# Altium PCB Steezy60ALPS.PcbDoc (part 1 of 3)
Units mm, origin at the board's own origin, x right, y up, seen from the top; angles counter-clockwise.
Board outline 284.73 x 94.2 mm, 2 copper layers (Component Side, Bottom Layer), stack 1.571 mm thick; 204 components, 132 nets, 895 pads, 223 vias.
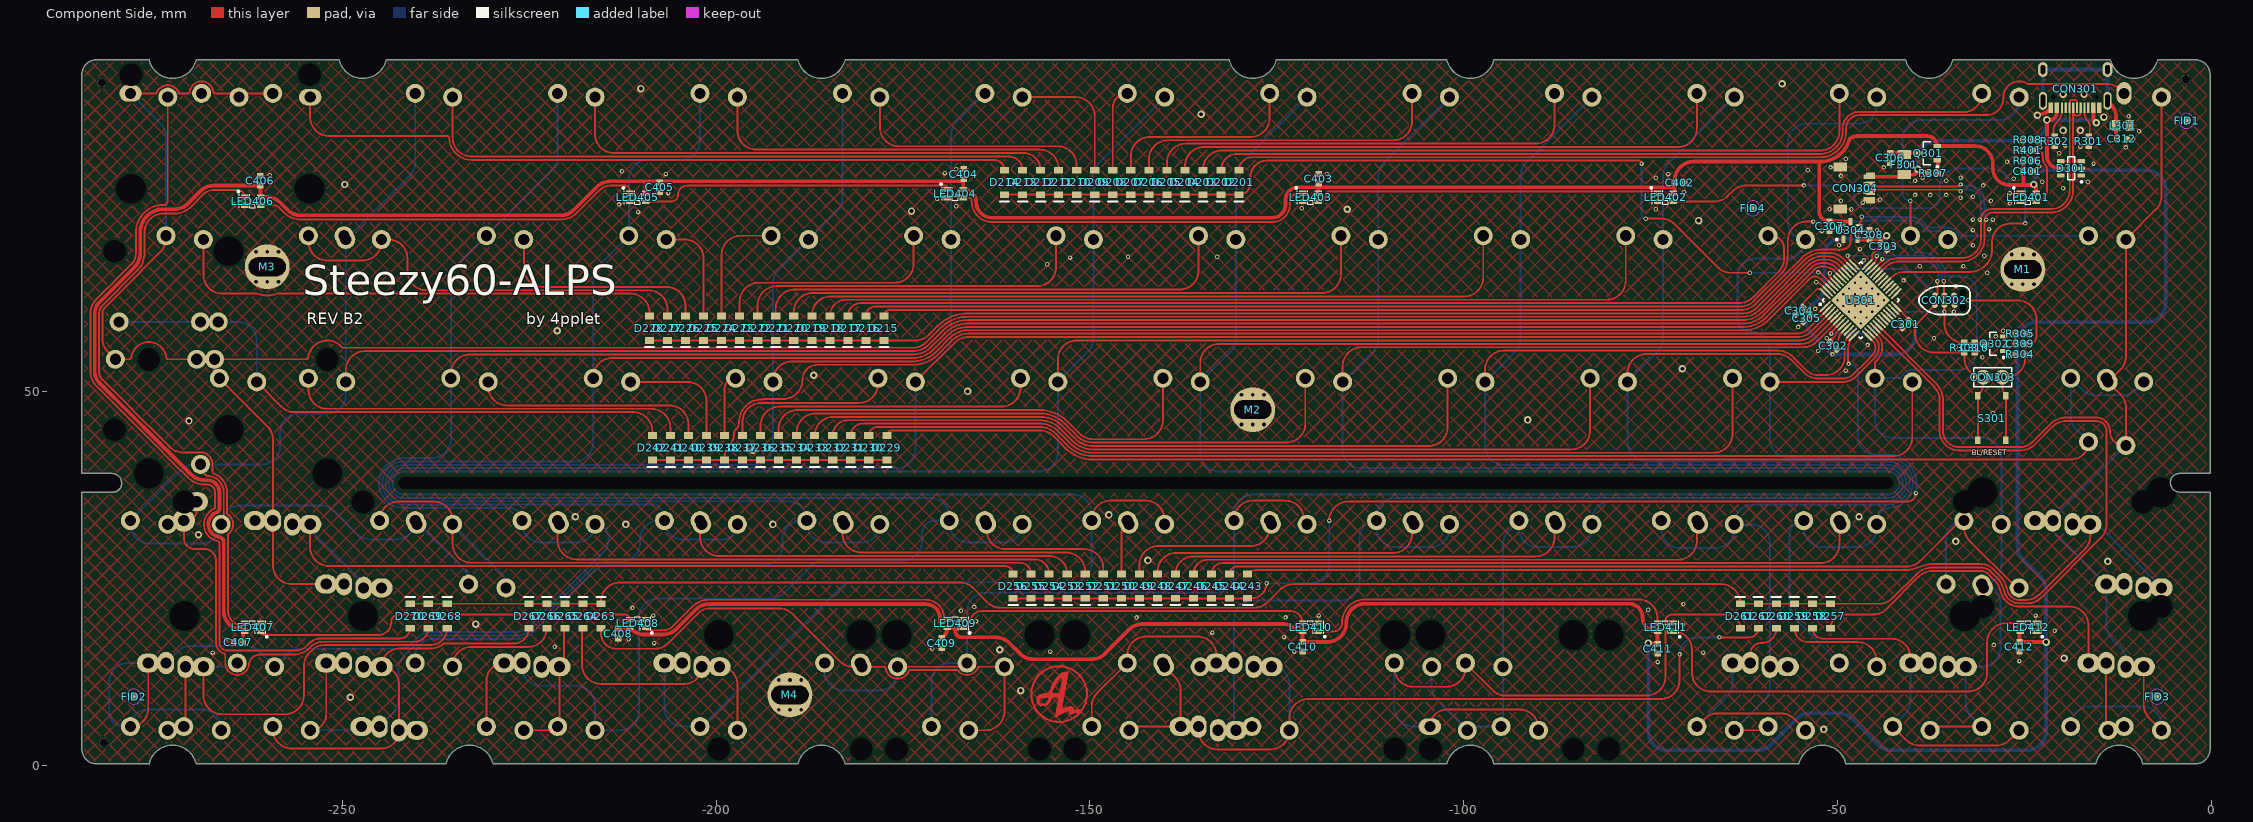
[diagram p0: Component Side view]
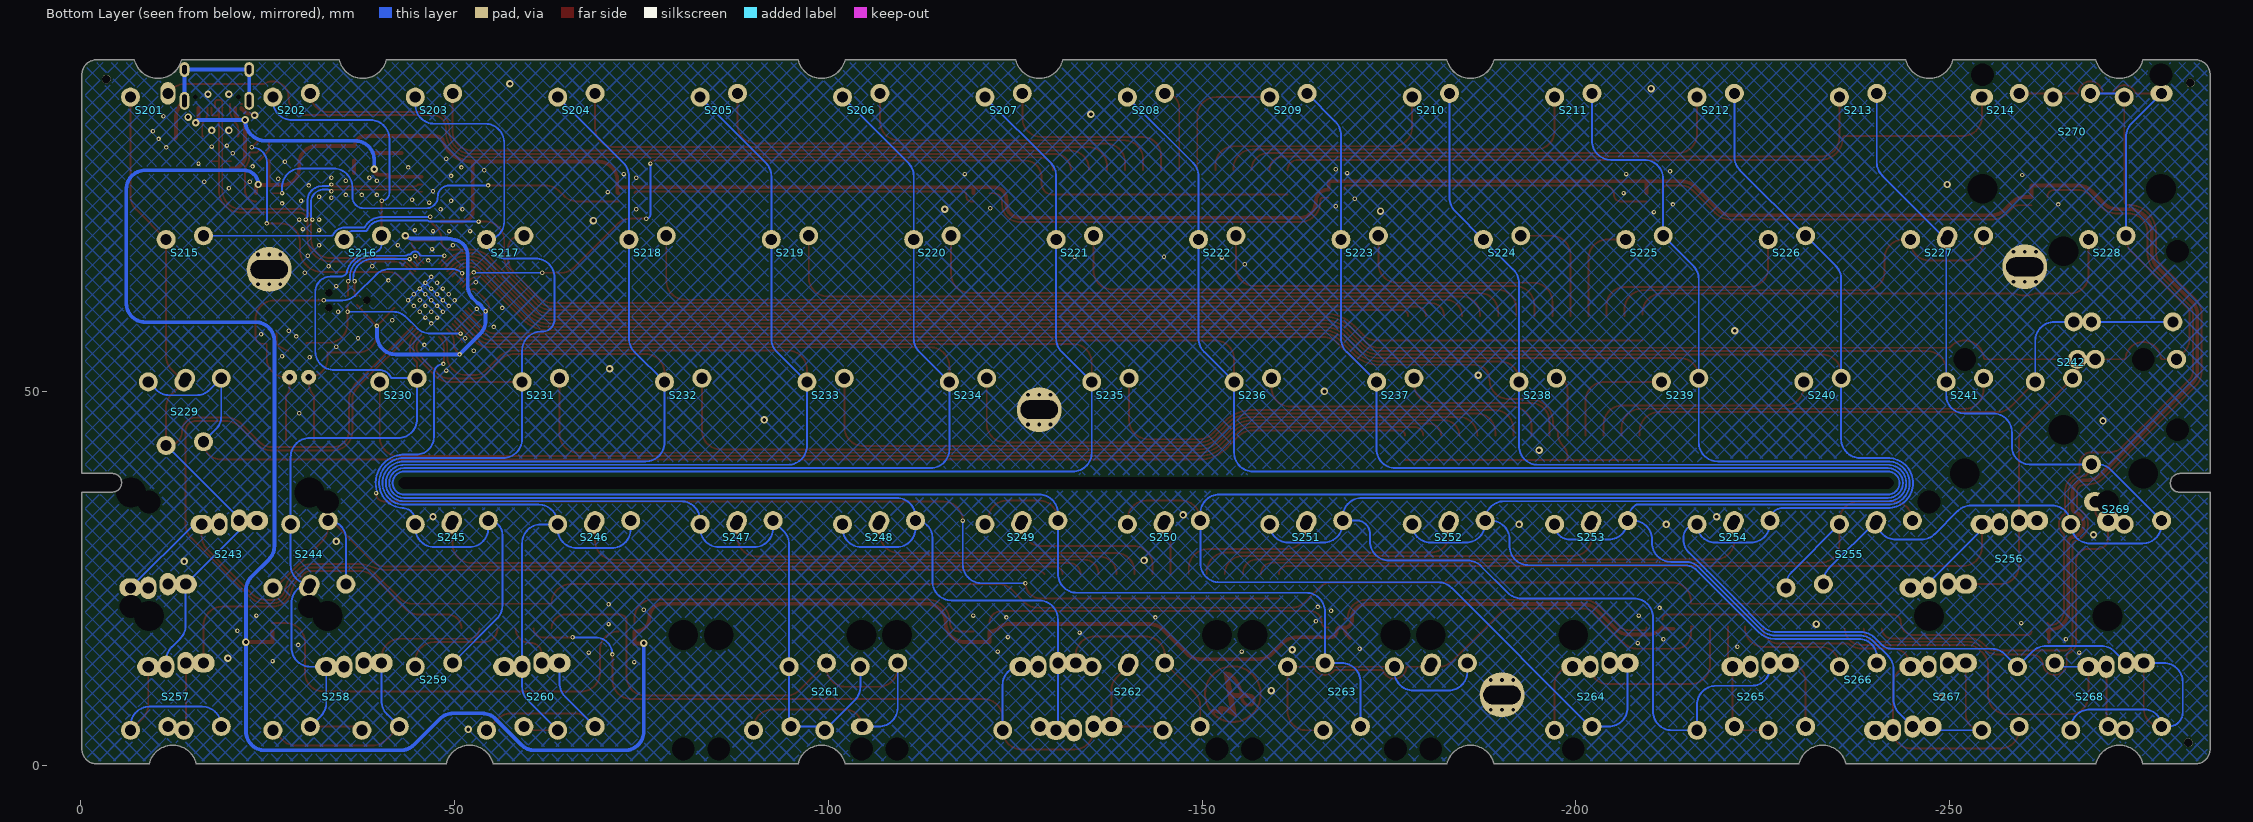
[diagram p1: Bottom Layer view, seen from below]
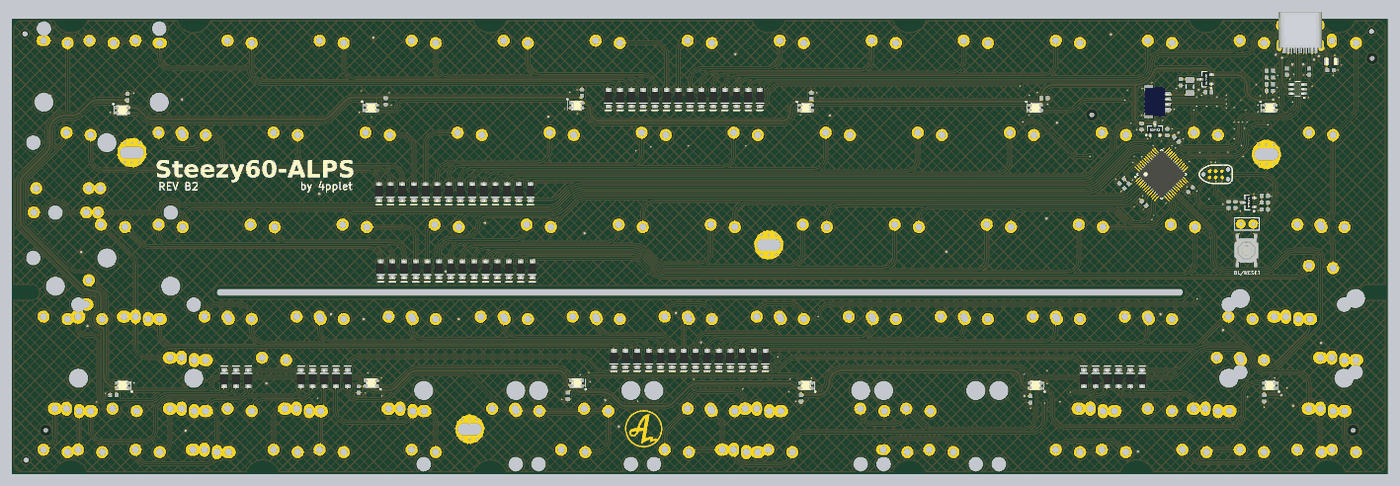
[diagram p4: 3D render of the assembled board from above, using the file's embedded part models]

## Layer stack, top to bottom
Top Solder: solder mask 0.0102, Solder Resist, Dk 3.5
Component Side: signal copper 0.0356
Dielectric 1: core 1.5, FR-4, Dk 4.2
Bottom Layer: signal copper 0.0356
Solder Side: solder mask 0.0102, Solder Resist, Dk 3.5

## Board outline
-284.85,2.215 ccw(c-282.85,2.215) -282.85,0.215 -275.85,0.215 cw(c-272.7,-0.52) -269.55,0.215 -236.137,0.215 cw(c-232.987,-0.52) -229.838,0.215 -189.05,0.215 cw(c-185.9,-0.52) -182.75,0.215 -102.25,0.215 cw(c-99.1,-0.52) -95.95,0.215 -55.161,0.215 cw(c-52.011,-0.52) -48.861,0.215 -15.45,0.215 cw(c-12.3,-0.52) -9.15,0.215 -2.15,0.215 ccw(c-2.15,2.215) -0.15,2.215 ccw(c-0.15,2.238) -0.127,2.238 -0.127,36.576 -4.191,36.576 cw(c-4.191,37.846) -5.461,37.846 cw(c-4.242,37.846) -4.242,39.065 -0.15,39.065 -0.15,92.415 ccw(c-2.15,92.415) -2.15,94.415 -7.177,94.415 cw(c-10.327,95.149) -13.477,94.415 -34.575,94.415 cw(c-37.724,95.149) -40.874,94.415 -95.95,94.415 cw(c-99.1,95.149) -102.25,94.415 -125.061,94.415 cw(c-128.211,95.149) -131.361,94.415 -182.75,94.415 cw(c-185.9,95.149) -189.05,94.415 -244.125,94.415 cw(c-247.274,95.149) -250.424,94.415 -269.55,94.415 cw(c-272.7,95.149) -275.85,94.415 -282.85,94.415 ccw(c-282.85,92.415) -284.85,92.415 -284.85,39.065 -280.797,39.065 cw(c-280.797,37.795) -279.527,37.795 -279.527,37.719 cw(c-280.67,37.719) -280.67,36.576 -284.861,36.576 -284.85,36.565

## Design rules (kind name [scope] priority, off if disabled: settings)
BoardOutlineClearance [All] p1: gap=0.254 ignorepadtopadclearanceinfootprint=FALSE except(0: Arc-SplitContinuation Track-SplitContinuation SMDPad-SplitContinuation THPad-SplitContinuation Via-SplitContinuation Fill-SplitContinuation Poly-SplitContinuation Region-SplitContinuation Text-SplitContinuation)
Clearance [All] p1: gap=0.2 ignorepadtopadclearanceinfootprint=FALSE except(0: Arc-Hole Track-Hole SMDPad-Hole THPad-Hole Via-Hole Fill-Hole Poly-Hole Region-Hole Text-Hole; 0.254: THPad-THPad THPad-Via THPad-Fill THPad-Poly THPad-Region THPad-Text Via-Via Via-Fill Via-Poly Via-Region Via-Text Fill-Fill Fill-Poly Fill-Region Fill-Text Poly-Poly Poly-Region Poly-Text Region-Region Region-Text Text-Text)
ComponentClearance [InComponent('No Component') And OnLayer('Component Side')] p1: gap=0.254 collisioncheckmode=3 verticalgap=0.254 showdistances=FALSE
DiffPairsRouting DiffPairsRouting_USB [InDifferentialPairClass('All Differential Pairs')] p1: maxlimit=0.254 minlimit=0.203 mostfreqgap=0.203 toplayer_minwidth=0.152 toplayer_maxwidth=0.381 toplayer_prefwidth=0.152 bottomlayer_minwidth=0.152 bottomlayer_maxwidth=0.381 bottomlayer_prefwidth=0.152 maxuncoupledlength=12.7
DiffPairsRouting [All] p2: maxlimit=0.254 minlimit=0.254 mostfreqgap=0.254 toplayer_minwidth=0.381 toplayer_maxwidth=0.381 toplayer_prefwidth=0.381 bottomlayer_minwidth=0.381 bottomlayer_maxwidth=0.381 bottomlayer_prefwidth=0.381 maxuncoupledlength=12.7
HoleSize [All] p1: absolutevalues=TRUE maxlimit=20 minlimit=0.025 maxpercent=80.000 minpercent=20.000
MatchedLengths MatchedLengths_USB_DiffPairs_1 [All] p1: tolerance=0.127 checknetsindiffpair=TRUE checkdiffpairvsdiffpair=FALSE checkxsignals=FALSE checkothers=FALSE
MatchedLengths MatchedLengths_USB_DiffPairs [All] p2: tolerance=0.127 checknetsindiffpair=TRUE checkdiffpairvsdiffpair=FALSE checkxsignals=FALSE checkothers=FALSE
PolygonConnect PolygonConnect_1 [All vs IsVia] p1: connectstyle=Direct reliefconductorwidth=0.254 reliefentries=4 polygonreliefangle="90 Angle" airgapwidth=0.254
PolygonConnect [All] p2: connectstyle=Relief reliefconductorwidth=0.254 reliefentries=4 polygonreliefangle="90 Angle" airgapwidth=0.254
RoutingVias [All] p1: holewidth=0.711 width=1.27 viastyle="Through Hole" minholewidth=0.711 minwidth=1.27 maxholewidth=0.711 maxwidth=1.27
SolderMaskExpansion [All] p1: expansion=0.102 istentingtop=FALSE
Width [All] p1: maxlimit=0.508 minlimit=0.203 preferedwidth=0.254 minimp=50.000000 maximp=50.000000 favimp=50.000000
27 further rules are at their usual default settings.

## Classes and differential pairs
component class Designator: C201 C202 C203 C204 C205 C206 D201 D202 D203 D204 D205 D206 D207 D208 D209 D210 D211 D212 D213 D214 D215 D216 D217 D218 D219 D220 D221 D222 D223 D224 D225 D226 D227 D228 D229 D230 D231 D232 D233 D234 D235 D236 D237 D238 D239 D240 D241 D242 D243 D244 D245 D246 D247 D248 D249 D250 D251 D252 D253 D254 D255 D256 D257 D258 D259 D260 D261 D262 D263 D264 D265 D266 D267 D268 D269 D270 S201 S202 S203 S204 S205 S206 S207 S208 S209 S210 S211 S212 S213 S214 S215 S216 S217 S218 S219 S220 S221 S222 S223 S224 S225 S226 S227 S228 S229 S230 S231 S232 S233 S234 S235 S236 S237 S238 S239 S240 S241 S242 S243 S244 S245 S246 S247 S248 S249 S250 S251 S252 S253 S254 S255 S256 S257 S258 S259 S260 S261 S262 S263 S264 S265 S266 S267 S268 S269 S270 S271
differential pair D: +D_P -D_N

## Components (designator, comment, footprint, x,y, rotation, side; value= is the part's Value field where it differs from the comment)
C301 "" C0603[1608] -40.894,59.055 r45 top value=0.1uF
C302 "" C0603[1608] -50.546,56.134 r315 top value=0.1uF
C303 "" C0603[1608] -43.815,69.469 r135 top value=0.1uF
C304 "" C0603[1608] -55.118,60.833 r45 top value=0.1uF
C305 "" C0603[1608] -54.102,59.817 r45 top value=0.1uF
C306 "" C0603[1608] -42.926,81.28 r90 top value=4.7uF
C307 "" C0603[1608] -51.054,72.136 r90 top value=1uF
C308 "" C0603[1608] -45.72,70.993 r270 top value=1uF
C309 "" C0603[1608] -25.531,56.416 r180 top value=4.7uF
C310 "" C0603[1608] -31.627,55.908 r270 top value=470nF
C312 "" C0603[1608] -11.938,83.82 r180 top value=0.1uF
C401 "" C0603[1608] -24.511,79.502 r180 top value=0.1uF
C402 "" C0603[1608] -71.12,77.978 r180 top value=0.1uF
C403 "" C0603[1608] -119.38,78.486 r270 top value=0.1uF
C404 "" C0603[1608] -166.878,79.121 r270 top value=0.1uF
C405 "" C0603[1608] -207.518,77.343 r90 top value=0.1uF
C406 "" C0603[1608] -260.985,78.232 r270 top value=0.1uF
C407 "" C0603[1608] -263.906,16.51 r0 top value=0.1uF
C408 "" C0603[1608] -213.106,17.653 r90 top value=0.1uF
C409 "" C0603[1608] -169.799,16.383 r90 top value=0.1uF
C410 "" C0603[1608] -121.539,15.875 r90 top value=0.1uF
C411 "" C0603[1608] -74.041,15.621 r90 top value=0.1uF
C412 "" C0603[1608] -25.654,15.875 r90 top value=0.1uF
CON301 "TYPE-C-31-M-12" TYPE-C-31-M-12 -18.2,88 r180 top
CON302 "TC2030-IDC" TC2030-IDC-NL -35.687,62.23 r0 top
CON303 "Header 2" HDR1X2 -27.94,51.943 r180 top
CON304 "Header 5" UDB_combo_JST_MOLEX -47.75,77.25 r270 top
D201 "Diode" SOD-123 -130.048,78 r90 top
D202 "Diode" SOD-123 -132.461,78 r90 top
D203 "Diode" SOD-123 -134.874,78 r90 top
D204 "Diode" SOD-123 -137.287,78 r90 top
D205 "Diode" SOD-123 -139.7,78 r90 top
D206 "Diode" SOD-123 -142.113,78 r90 top
D207 "Diode" SOD-123 -144.526,78 r90 top
D208 "Diode" SOD-123 -146.939,78 r90 top
D209 "Diode" SOD-123 -149.352,78 r90 top
D210 "Diode" SOD-123 -151.765,78 r90 top
D211 "Diode" SOD-123 -154.178,78 r90 top
D212 "Diode" SOD-123 -156.591,78 r90 top
D213 "Diode" SOD-123 -159.004,78 r90 top
D214 "Diode" SOD-123 -161.417,78 r90 top
D215 "Diode" SOD-123 -177.546,58.5 r90 top
D216 "Diode" SOD-123 -179.959,58.5 r90 top
D217 "Diode" SOD-123 -182.372,58.5 r90 top
D218 "Diode" SOD-123 -184.785,58.5 r90 top
D219 "Diode" SOD-123 -187.198,58.5 r90 top
D220 "Diode" SOD-123 -189.611,58.5 r90 top
D221 "Diode" SOD-123 -192.024,58.5 r90 top
D222 "Diode" SOD-123 -194.437,58.5 r90 top
D223 "Diode" SOD-123 -196.85,58.5 r90 top
D224 "Diode" SOD-123 -199.263,58.5 r90 top
D225 "Diode" SOD-123 -201.676,58.5 r90 top
D226 "Diode" SOD-123 -204.089,58.5 r90 top
D227 "Diode" SOD-123 -206.502,58.5 r90 top
D228 "Diode" SOD-123 -208.915,58.5 r90 top
D229 "Diode" SOD-123 -177.165,42.5 r90 top
D230 "Diode" SOD-123 -179.578,42.5 r90 top
D231 "Diode" SOD-123 -181.991,42.5 r90 top
D232 "Diode" SOD-123 -184.404,42.5 r90 top
D233 "Diode" SOD-123 -186.817,42.5 r90 top
D234 "Diode" SOD-123 -189.23,42.5 r90 top
D235 "Diode" SOD-123 -191.643,42.5 r90 top
D236 "Diode" SOD-123 -194.056,42.5 r90 top
D237 "Diode" SOD-123 -196.469,42.5 r90 top
D238 "Diode" SOD-123 -198.882,42.5 r90 top
D239 "Diode" SOD-123 -201.295,42.5 r90 top
D240 "Diode" SOD-123 -203.708,42.5 r90 top
D241 "Diode" SOD-123 -206.121,42.5 r90 top
D242 "Diode" SOD-123 -208.534,42.5 r90 top
D243 "Diode" SOD-123 -128.905,24 r90 top
D244 "Diode" SOD-123 -131.318,24 r90 top
D245 "Diode" SOD-123 -133.731,24 r90 top
D246 "Diode" SOD-123 -136.144,24 r90 top
D247 "Diode" SOD-123 -138.557,24 r90 top
D248 "Diode" SOD-123 -140.97,24 r90 top
D249 "Diode" SOD-123 -143.383,24 r90 top
D250 "Diode" SOD-123 -145.796,24 r90 top
D251 "Diode" SOD-123 -148.209,24 r90 top
D252 "Diode" SOD-123 -150.622,24 r90 top
D253 "Diode" SOD-123 -153.035,24 r90 top
D254 "Diode" SOD-123 -155.448,24 r90 top
D255 "Diode" SOD-123 -157.861,24 r90 top
D256 "Diode" SOD-123 -160.274,24 r90 top
D257 "Diode" SOD-123 -50.927,20 r270 top
D258 "Diode" SOD-123 -53.34,20 r270 top
D259 "Diode" SOD-123 -55.753,20 r270 top
D260 "Diode" SOD-123 -58.166,20 r270 top
D261 "Diode" SOD-123 -62.992,20 r270 top
D262 "Diode" SOD-123 -60.579,20 r270 top
D263 "Diode" SOD-123 -215.392,20 r270 top
D264 "Diode" SOD-123 -217.805,20 r270 top
D265 "Diode" SOD-123 -220.218,20 r270 top
D266 "Diode" SOD-123 -222.631,20 r270 top
D267 "Diode" SOD-123 -225.044,20 r270 top
D268 "Diode" SOD-123 -235.966,20 r270 top
D269 "Diode" SOD-123 -238.506,20 r270 top
D270 "Diode" SOD-123 -240.919,20 r270 top
D301 "SRV05" SOT-23-6 -18.73,79.883 r0 top
F301 "Fuse Thermal" C1206[3216] -41.052,80.391 r270 top
FID1 "Plug" FIDUCIAL_NORDIC -3.302,86.233 r270 top
FID2 "Plug" FIDUCIAL_NORDIC -277.876,9.215 r270 top
FID3 "Plug" FIDUCIAL_NORDIC -7.239,9.215 r270 top
FID4 "Plug" Fiducial_Nordic -61.341,74.549 r90 top
L301 "Inductor" L0805 -11.811,85.598 r180 top
LED401 "WS2812B" "WS2812B - 2020" -24.5,76 r0 top locked
LED402 "WS2812B" "WS2812B - 2020" -73,76 r0 top locked
LED403 "WS2812B" "WS2812B - 2020" -120.486,76 r0 top locked
LED404 "WS2812B" "WS2812B - 2020" -168,76.5 r0 top locked
LED405 "WS2812B" "WS2812B - 2020" -210.5,76 r0 top locked
LED406 "WS2812B" "WS2812B - 2020" -262,75.5 r0 top locked
LED407 "WS2812B" "WS2812B - 2020" -262,18.5 r180 top locked
LED408 "WS2812B" "WS2812B - 2020" -210.5,19 r180 top locked
LED409 "WS2812B" "WS2812B - 2020" -168,19 r180 top locked
LED410 "WS2812B" "WS2812B - 2020" -120.486,18.5 r180 top locked
LED411 "WS2812B" "WS2812B - 2020" -73,18.5 r180 top locked
LED412 "WS2812B" "WS2812B - 2020" -24.5,18.5 r180 top locked
M1 "Socket" mounting_hole -25.2,66.365 r0 top
M2 "Socket" mounting_hole -128.212,47.614 r0 top
M3 "Socket" mounting_hole -260.05,66.715 r0 top
M4 "Socket" mounting_hole -190.119,9.45 r0 top
Q301 "PMOS-2" SOT-23-3 -37.846,81.915 r0 top
Q302 "2N7002 NMOS" SOT-23-3 -28.96,56.416 r0 top
R301 "Res1" R0603[1608] -16.383,83.5 r270 top value=5k1
R302 "Res1" R0603[1608] -20.955,83.5 r270 top value=5k1
R303 "Res1" R0603[1608] -33.024,55.908 r90 top value=10K
R304 "Res1" R0603[1608] -25.527,54.991 r180 top value=10K
R305 "Res1" R0603[1608] -25.527,57.785 r0 top value=100K
R306 "Res1" R0603[1608] -24.511,80.899 r0 top value=10K
R307 "Res1" R0603[1608] -37.211,79.248 r180 top value=10K
R308 "Res1" R0603[1608] -24.511,83.693 r0 top value=470
R401 "Res1" R0603[1608] -24.511,82.296 r0 top value=470R
S201 "MX" "Alps-switch - switched pol"#1 -9.15,85.415 r180 bottom
S202 "MX" "Alps-switch - switched pol"#2 -28.2,85.415 r180 bottom locked
S203 "MX" "Alps-switch - switched pol"#2 -47.25,85.415 r180 bottom locked
S204 "MX" "Alps-switch - switched pol"#2 -66.3,85.415 r180 bottom locked
S205 "MX" "Alps-switch - switched pol"#2 -85.35,85.415 r180 bottom locked
S206 "MX" "Alps-switch - switched pol"#2 -104.4,85.415 r180 bottom locked
S207 "MX" "Alps-switch - switched pol"#2 -123.45,85.415 r180 bottom locked
S208 "MX" "Alps-switch - switched pol"#2 -142.5,85.415 r180 bottom locked
S209 "MX" ALPS-SWITCH -161.55,85.415 r180 bottom locked
S210 "MX" ALPS-SWITCH -180.6,85.415 r180 bottom locked
S211 "MX" ALPS-SWITCH -199.65,85.415 r180 bottom locked
S212 "MX" ALPS-SWITCH -218.7,85.415 r180 bottom locked
S213 "MX" ALPS-SWITCH -237.75,85.415 r180 bottom locked
S214 "MX" "ALPS-SWITCH - FLAT PIN1" -256.8,85.415 r180 bottom
S215 "MX" "ALPS-switch - 1.25U - switched pol" -13.912,66.365 r180 bottom locked
S216 "MX" ALPS-SWITCH -37.725,66.365 r180 bottom locked
S217 "MX" "Alps-switch - switched pol"#2 -56.775,66.365 r180 bottom locked
S218 "MX" "Alps-switch - switched pol"#2 -75.825,66.365 r180 bottom locked
S219 "MX" "Alps-switch - switched pol"#2 -94.875,66.365 r180 bottom locked
S220 "MX" "Alps-switch - switched pol"#2 -113.925,66.365 r180 bottom locked
S221 "MX" "Alps-switch - switched pol"#2 -132.975,66.365 r180 bottom locked
S222 "MX" "Alps-switch - switched pol"#2 -152.025,66.365 r180 bottom locked
S223 "MX" "Alps-switch - switched pol"#2 -171.075,66.365 r180 bottom locked
S224 "MX" "Alps-switch - switched pol"#2 -190.125,66.365 r180 bottom locked
S225 "MX" ALPS-SWITCH -209.175,66.365 r180 bottom locked
S226 "MX" ALPS-SWITCH -228.225,66.365 r180 bottom locked
S227 "MX" "ALPS-SWITCH - OFFSET-R" -247.275,66.365 r180 bottom locked
S228 "MX" "ALPS-SWITCH - 1.5U" -271.087,66.365 r180 bottom locked
S229 "MX" "ALPS-SWITCH - CAPS" -16.294,47.315 r180 bottom locked
S230 "MX" ALPS-SWITCH -42.487,47.315 r180 bottom locked
S231 "MX" "Alps-switch - switched pol"#2 -61.537,47.315 r180 bottom locked
S232 "MX" "Alps-switch - switched pol"#2 -80.587,47.315 r180 bottom locked
S233 "MX" "Alps-switch - switched pol"#2 -99.637,47.315 r180 bottom locked
S234 "MX" "Alps-switch - switched pol"#2 -118.687,47.315 r180 bottom locked
S235 "MX" "Alps-switch - switched pol"#2 -137.737,47.315 r180 bottom locked
S236 "MX" "Alps-switch - switched pol"#2 -156.787,47.315 r180 bottom locked
S237 "MX" "Alps-switch - switched pol"#2 -175.837,47.315 r180 bottom locked
S238 "MX" "Alps-switch - switched pol"#2 -194.887,47.315 r180 bottom locked
S239 "MX" ALPS-SWITCH -213.937,47.315 r180 bottom locked
S240 "MX" ALPS-SWITCH -232.987,47.315 r180 bottom locked
S241 "MX" "Alps-switch - switched pol"#3 -252.037,47.315 r180 bottom locked
S242 "MX" "ALPS-switch - Enter - rotated stab" -263.95,47.315 r180 bottom locked
S243 "MX" "ALPS-SWITCH - LEFT SHIFT" -21.056,28.265 r180 bottom locked
S244 "MX" "ALPS-SWITCH - SMALLEROFFSET-R" -32.962,28.265 r0 bottom
S245 "MX" "ALPS-SWITCH - OFFSET" -52.012,28.265 r180 bottom locked
S246 "MX" "ALPS-SWITCH - OFFSET" -71.062,28.265 r180 bottom locked
S247 "MX" "ALPS-SWITCH - OFFSET" -90.112,28.265 r180 bottom locked
S248 "MX" "ALPS-SWITCH - OFFSET" -109.162,28.265 r180 bottom locked
S249 "MX" "ALPS-SWITCH - OFFSET" -128.212,28.265 r180 bottom locked
S250 "MX" "ALPS-SWITCH - OFFSET" -147.262,28.265 r180 bottom locked
S251 "MX" "ALPS-SWITCH - OFFSET" -166.312,28.265 r180 bottom locked
S252 "MX" "ALPS-SWITCH - OFFSET" -185.362,28.265 r180 bottom locked
S253 "MX" "ALPS-SWITCH - OFFSET" -204.412,28.265 r180 bottom locked
S254 "MX" "ALPS-SWITCH - OFFSET" -223.462,28.265 r180 bottom locked
S255 "MX" "ALPS-SWITCH - CRAZY SHIFT" -237.75,28.265 r180 bottom locked
S256 "MX" "ALPS-SWITCH - RIGHT SHIFT" -259.18,28.265 r180 bottom locked
S257 "MX" "ALPS-switch - L_CTRL" -13.912,9.215 r180 bottom locked
S258 "MX" "ALPS-SWITCH - L_WIN" -37.724,9.215 r180 bottom
S259 "MX" ALPS-SWITCH -47.25,9.215 r180 bottom
S260 "MX" "ALPS-SWITCH - L_ALT" -61.537,9.215 r180 bottom locked
S261 "MX" "ALPS-SWITCH - L SPLIT SPACE" -102.018,9.215 r0 bottom locked
S262 "MX" "ALPS-SWITCH - SPACE" -142.499,9.215 r180 bottom locked
S263 "MX" "ALPS-switch - R split space" -163.931,9.215 r0 bottom locked
S264 "MX" "ALPS-SWITCH - R PN" -202.031,9.215 r180 bottom
S265 "MX" "ALPS-SWITCH - R_ALT" -223.462,9.215 r180 bottom
S266 "MX" ALPS-SWITCH -237.75,9.215 r180 bottom
S267 "MX" "ALPS-SWITCH - R_WIN" -247.274,9.215 r180 bottom locked
S268 "MX" "ALPS-SWITCH - R_CTRL" -271.087,9.215 r180 bottom locked
S269 "MX" "ALPS-SWITCH - FN AND SHIFT" -275.85,28.265 r180 bottom
S270 "MX" "ALPS-SWITCH - BACKSPACE" -266.325,85.415 r180 bottom
S301 "SW-PB" "XKB Switch" -29.337,46.482 r90 top
U301 "STM32F072/F303_LQFP48" "STM32 - COMBO 7X7MM" -46.89,62.251 r315 top
U304 "XC6206P332MR" SOT-23-3 -48.26,71.571 r270 top

## Footprints (in the part's own frame and the unit in brackets; to place one, negate y for a bottom-side part, rotate by r counter-clockwise, add the part's x,y. Pads: shape width x height; smd on the part's side, far side on the other; paste and mask are expansions set on the pad)
ALPS-SWITCH [mm]
  round 2.54 hole 1.499 mask+0.102: 1(-2.5,4) 2(2.5,4.5)
  round 1 on Mech14: ""(0,0)
"ALPS-SWITCH - 1.5U" [mm]
  round 2.54 hole 1.499 mask+0.102: 1(-2.5,4) 2(2.5,4.5)
  round 1 on Mech14: ""(0,0)
"ALPS-switch - 1.25U - switched pol" [mm]
  round 2.54 hole 1.499 mask+0.102: 1(2.5,4.5) 2(-2.5,4)
  round 1 on Mech14: ""(0,0)
"ALPS-SWITCH - BACKSPACE" [mil]
  round 100 hole 59 mask+4: 1(98.43,177.17) 1(276.57,157.48) 2(-98.43,157.48)
  oval 118.11x86.61 hole 59 mask+4: 2(473.43,177.17)
  round 60 hole 157.01 unplated: ""(-470,-325) ""(470,-325)
  round 60 hole 120 unplated: ""(-470,275) ""(470,275)
  round 39.37 on Mech14: ""(0,0) ""(375,0)
"ALPS-SWITCH - CAPS" [mm]
  round 2.54 hole 1.499 mask+0.102: 1(-7.263,4) 1(0.119,-4) 1(2.5,4.5) 2(-4.881,-4.5) 2(-2.5,4) 2(-2.262,4.5)
  round 1 on Mech14: ""(-4.763,0) ""(-2.381,0) ""(0,0)
"ALPS-SWITCH - CRAZY SHIFT" [mm]
  round 2.54 hole 1.499 mask+0.102: 1(-9.644,-4.5) 1(-2.5,4) 1(7.263,4.5) 2(-4.644,-4) 2(2.262,4) 2(2.5,4.5)
  round 1 on Mech14: ""(-7.144,0) ""(0,0) ""(4.763,0)
"ALPS-switch - Enter - rotated stab" [mil]
  round 100 hole 59 mask+4: 1(-98.43,157.48) 1(104.28,473.62) 1(198.03,473.62) 1(626.43,473.62) 2(98.43,177.17) 2(123.97,276.77) 2(217.72,276.77) 2(646.11,276.77)
  round 60 hole 157.01 unplated: ""(-470,-325) ""(50.2,-94.8) ""(50.2,845.2) ""(470,-325)
  round 60 hole 120 unplated: ""(-470,275) ""(470,275) ""(650.2,-94.8) ""(650.2,845.2)
  round 39.37 on Mech14: ""(0,0) ""(281.45,375.2) ""(375.2,375.2) ""(468.95,375.2)
"ALPS-SWITCH - FLAT PIN1" [mm]
  oval 3x2.2 hole 1.499 mask+0.102: 1(-2.5,4)
  round 2.54 hole 1.499 mask+0.102: 2(2.5,4.5)
  round 1 on Mech14: ""(0,0)
"ALPS-SWITCH - FN AND SHIFT" [mm]
  oval 3x2.54 hole 1.499 mask+0.102: 1(-6.381,7.025)
  round 3 hole 1.499 mask+0.102: 1(-4.644,4.5)
  round 2.54 hole 1.499 mask+0.102: 1(-2.5,4) 2(-9.644,4) 2(-6.881,12.025) 2(2.5,4.5)
  round 1 on Mech14: ""(-7.144,0) ""(-2.381,9.525) ""(0,0)
"ALPS-SWITCH - L SPLIT SPACE" [mil]
  round 100 hole 59 mask+4: 1(-285.93,-177.17) 1(89.07,-177.17) 1(473.43,177.17) 2(-89.07,-157.48) 2(98.43,177.17) 2(276.57,157.48) 2(285.93,-157.48)
  oval 118.11x86.61 hole 59 mask+4: 1(-98.43,157.48)
  round 60 hole 157.01 unplated: ""(-282.5,-325) ""(-95,-325)
  round 60 hole 120 unplated: ""(-282.5,275) ""(-95,275)
  round 39.37 on Mech14: ""(-187.5,0) ""(0,0) ""(187.5,0) ""(375,0)
"ALPS-SWITCH - L_ALT" [mm]
  round 2.54 hole 1.499 mask+0.102: 1(-7.263,-4.5) 1(7.263,-4) 2(-2.262,-4) 2(2.262,-4.5)
  oval 2.2x3 hole 1.499 mask+0.102: 1(0.119,4.5) 2(-2.5,4)
  oval 3x2.54 hole 1.499 mask+0.102: 1(2.5,4.5) 2(-4.881,4)
  round 1 on Mech14: ""(-4.763,0) ""(-2.381,0) ""(0,0) ""(4.763,0)
"ALPS-switch - L_CTRL" [mm]
  round 2.54 hole 1.499 mask+0.102: 1(-2.262,-4) 1(-0.119,-4.5) 2(-7.263,-4.5) 2(4.881,-4)
  oval 2.2x3 hole 1.499 mask+0.102: 1(0.119,4.5) 2(-2.5,4)
  oval 3x2.54 hole 1.499 mask+0.102: 1(2.5,4.5) 2(-4.881,4)
  round 1 on Mech14: ""(-4.763,0) ""(-2.381,0) ""(0,0) ""(2.381,0)
"ALPS-SWITCH - L_WIN" [mm]
  round 2.54 hole 1.499 mask+0.102: 1(-12.025,-4.5) 1(4.881,-4) 2(-7.025,-4) 2(-0.119,-4.5)
  oval 2.2x3 hole 1.499 mask+0.102: 1(0.119,4.5) 2(-2.5,4)
  oval 3x2.54 hole 1.499 mask+0.102: 1(2.5,4.5) 2(-4.881,4)
  round 1 on Mech14: ""(-9.525,0) ""(-2.381,0) ""(0,0) ""(2.381,0)
"ALPS-SWITCH - LEFT SHIFT" [mm]
  oval 3x2.54 hole 1.499 mask+0.102: 1(-14.406,-4.5) 1(-4.881,4) 2(-7.025,-4) 2(2.5,4.5)
  oval 2.2x3 hole 1.499 mask+0.102: 1(-12.025,-4.5) 1(-2.5,4) 2(-9.406,-4) 2(0.119,4.5)
  round 1.524 hole 3.048 unplated: ""(-14.319,-6.985) ""(-11.938,6.985) ""(9.557,-6.985) ""(11.938,6.985)
  round 1.524 hole 3.988 unplated: ""(-14.319,8.255) ""(-11.938,-8.255) ""(9.557,8.255) ""(11.938,-8.255)
  round 1 on Mech14: ""(-11.906,0) ""(-9.525,0) ""(-2.381,0) ""(0,0)
"ALPS-SWITCH - OFFSET" [mm]
  round 2.54 hole 1.499 mask+0.102: 1(-2.5,4) 1(-2.262,4.5) 2(-7.263,4) 2(2.5,4.5)
  round 1 on Mech14: ""(-4.763,0) ""(0,0)
"ALPS-SWITCH - OFFSET-R" [mm]
  round 2.54 hole 1.499 mask+0.102: 1(-2.5,4) 1(7.263,4.5) 2(2.262,4) 2(2.5,4.5)
  round 1 on Mech14: ""(-4.763,0) ""(0,0) ""(4.763,0)
"ALPS-SWITCH - R PN" [mm]
  round 2.54 hole 1.499 mask+0.102: 1(-4.881,-4.5) 2(0.119,-4)
  oval 3x2.54 hole 1.499 mask+0.102: 1(-2.5,4) 2(4.881,4.5)
  oval 2.2x3 hole 1.499 mask+0.102: 1(-0.119,4) 2(2.5,4.5)
  round 1 on Mech14: ""(-2.381,0) ""(0,0) ""(2.381,0)
"ALPS-switch - R split space" [mil]
  round 100 hole 59 mask+4: 1(-660.93,-177.17) 1(-651.57,-157.48) 1(-89.07,177.17) 1(98.43,-157.48) 2(-848.43,-177.17) 2(-464.07,-157.48) 2(-285.93,157.48) 2(-98.43,-177.17)
  round 39.37 on Mech14: ""(-750,0) ""(-562.5,0) ""(-187.5,0) ""(0,0) ""(0,0)
  round 60 hole 157.01 unplated: ""(-470,-325) ""(282.5,-325) ""(470,-325)
  round 60 hole 120 unplated: ""(-470,275) ""(282.5,275) ""(470,275)
"ALPS-SWITCH - R_ALT" [mm]
  oval 3x2.54 hole 1.499 mask+0.102: 1(-2.5,4) 2(4.881,4.5)
  round 2.54 hole 1.499 mask+0.102: 1(-2.262,-4) 1(2.262,-4.5) 2(-7.263,-4.5) 2(7.263,-4)
  oval 2.2x3 hole 1.499 mask+0.102: 1(-0.119,4) 2(2.5,4.5)
  round 1 on Mech14: ""(-4.763,0) ""(0,0) ""(2.381,0) ""(4.763,0)
"ALPS-SWITCH - R_CTRL" [mm]
  round 2.54 hole 1.499 mask+0.102: 1(-7.025,4.5) 1(0.119,-4) 1(2.262,-4.5) 2(-12.025,4) 2(-4.881,-4.5) 2(7.263,-4)
  oval 3x2.54 hole 1.499 mask+0.102: 1(-2.5,4) 2(4.881,4.5)
  oval 2.2x3 hole 1.499 mask+0.102: 1(-0.119,4) 2(2.5,4.5)
  round 1 on Mech14: ""(-9.525,0) ""(-2.381,0) ""(0,0) ""(2.381,0) ""(4.763,0)
"ALPS-SWITCH - R_WIN" [mm]
  oval 3x2.54 hole 1.499 mask+0.102: 1(-7.237,-4.5) 1(-2.5,4) 2(0.144,-4) 2(4.881,4.5)
  oval 2.2x3 hole 1.499 mask+0.102: 1(-4.856,-4.5) 1(-0.119,4) 2(-2.237,-4) 2(2.5,4.5)
  round 2.54 hole 1.499 mask+0.102: 1(12.025,-4) 2(7.025,-4.5)
  round 1 on Mech14: ""(-4.763,0) ""(-2.381,0) ""(0,0) ""(2.381,0) ""(9.525,0)
"ALPS-SWITCH - RIGHT SHIFT" [mm]
  oval 3x2.54 hole 1.499 mask+0.102: 1(-14.406,-4.5) 1(-4.881,4) 2(-7.025,-4) 2(2.5,4.5)
  oval 2.2x3 hole 1.499 mask+0.102: 1(-12.025,-4.5) 1(-2.5,4) 2(-9.406,-4) 2(0.119,4.5)
  round 1.524 hole 3.988 unplated: ""(-11.938,-8.255) ""(11.938,-8.255)
  round 1.524 hole 3.048 unplated: ""(-11.938,6.985) ""(11.938,6.985)
  round 1 on Mech14: ""(-11.906,0) ""(-9.525,0) ""(-2.381,0) ""(0,0)
"ALPS-SWITCH - SMALLEROFFSET-R" [mm]
  round 2.54 hole 1.499 mask+0.102: 1(-2.5,4) 1(-0.119,-4.5) 1(7.263,4.5) 2(2.262,4) 2(2.5,4.5) 2(4.881,-4)
  round 1 on Mech14: ""(0,0) ""(2.381,0) ""(4.763,0)
"ALPS-SWITCH - SPACE" [mm]
  round 2.54 hole 1.499 mask+0.102: 1(-19.176,-4.5) 1(-2.5,4) 1(-2.248,4.5) 1(2.248,-4.5) 2(-14.176,-4) 2(-7.248,4) 2(2.5,4.5) 2(7.248,-4)
  oval 3x2.54 hole 1.499 mask+0.102: 1(-16.795,4) 1(-4.644,-4) 2(-12.025,-4.5) 2(-9.414,4.5)
  oval 2.2x3 hole 1.499 mask+0.102: 1(-14.414,4) 1(-7.025,-4) 2(-11.795,4.5) 2(-9.644,-4.5)
  round 1.524 hole 3.048 unplated: ""(-61.91,-6.985) ""(-57.15,-6.985) ""(38.09,-6.985) ""(57.15,-6.985)
  round 1.524 hole 3.988 unplated: ""(-61.91,8.255) ""(-57.15,8.255) ""(38.09,8.255) ""(57.15,8.255)
  round 1 on Mech14: ""(-16.676,0) ""(-14.295,0) ""(-11.914,0) ""(-9.525,0) ""(-7.136,0) ""(-4.748,0) ""(0,0) ""(4.748,0)
"Alps-switch - switched pol"#1 [mm]
  oval 2x3 hole 1.499 mask+0.102: 1(2.5,4.5)
  round 2.54 hole 1.499 mask+0.102: 2(-2.5,4)
  round 1 on Mech14: ""(0,0)
"Alps-switch - switched pol"#2 [mm]
  round 2.54 hole 1.499 mask+0.102: 1(2.5,4.5) 2(-2.5,4)
  round 1 on Mech14: ""(0,0)
"Alps-switch - switched pol"#3 [mm]
  round 2.54 hole 1.5 mask+0.102: 1(2.5,4.5) 2(-2.5,4)
  round 1 on Mech14: ""(0,0)
C0603[1608] [mm] "Chip Resistor, 2-Leads, Body 1,57x0,80mm, IPC Medium Density"
  rect 0.8x0.85 smd: 1(-0.65,0) 2(0.65,0)
  body extent -0.83,-0.43 0.82,0.43, height 0.5
C1206[3216] [mm]
  rect 1.2x1.8 smd: 1(-1.35,0) 2(1.35,0)
  silkscreen extent -0.35,-0.8 0.35,0.8, body extent -1.6,-0.9 1.6,0.9, height 1.2
FIDUCIAL_NORDIC [mm]
  round 1 smd paste+0 mask+0.5: 0(0,0)
  Component Side keep-out circle w0.01: c0,0 r1
Fiducial_Nordic [mm]
  round 1 smd paste+0 mask+0.5: 0(0,0)
  Component Side keep-out circle w0.01: c0,0 r1
HDR1X2 [mm] "Connector; Header; 2 Position"
  round 2 hole 0.9 mask+0.102: 1(0,0) 2(2.54,0)
  silkscreen extent -1.27,-1.27 3.81,1.27
L0805 [mm] "based on Sunlord-GZ2012D101TF_C1015 datasheet"
  rect 1.16x1.47 smd: 1(-0.92,0) 2(0.92,0)
  body extent -1.15,-0.72 1.15,0.72, height 1.02
mounting_hole [mm]
  round 1 hole 0.5 paste+0 mask+0: 1(-1.5,-2) 1(-1.5,2) 1(0,-2) 1(0,2) 1(1.5,-2) 1(1.5,2)
  round 6 hole 2.5 slot 5 at 0 deg: 1(0,0)
R0603[1608] [mm] "Chip Resistor, 2-Leads, Body 1,57x0,80mm, IPC Medium Density"
  rect 0.8x0.85 smd: 1(-0.65,0) 2(0.65,0)
  body extent -0.83,-0.43 0.82,0.43, height 0.5
SOD-123 [mm]
  rect 0.91x1.22 smd: 1(1.635,0) 2(-1.635,0)
  silkscreen extent -2.54,-0.64 -2.54,0.63, body extent -1.87,-0.85 1.88,0.85, height 1.2
SOT-23-3 [mm] "3.3v regulator, used in Windsond S2 proto 1"
  rect 1x0.55 smd: 1(1.2,-0.95) 2(1.2,0.95) 3(-1.2,0)
  silkscreen extent -0.7,-1.95 1.33,1.55, body extent -1.1,-1.5 1.45,1.5, height 1
SOT-23-6 [mm]
  rect 1x0.55 smd: 1(1.375,-0.95) 2(1.375,0) 3(1.375,0.95) 4(-1.375,0.95) 5(-1.375,0) 6(-1.375,-0.95)
  silkscreen extent -0.46,-1.92 1.5,1.55, body extent -1.47,-1.49 1.37,1.44, height 1.05
"STM32 - COMBO 7X7MM" [mm] "LQFP48, 7x7mm"
  oval 0.3x1.45 smd paste-5: 1(-2.75,-4.225) 2(-2.25,-4.225) 3(-1.75,-4.225) 4(-1.25,-4.225) 5(-0.75,-4.225) 6(-0.25,-4.225) 7(0.25,-4.225) 8(0.75,-4.225) 9(1.25,-4.225) 10(1.75,-4.225) 11(2.25,-4.225) 12(2.75,-4.225) 25(2.75,4.225) 26(2.25,4.225) 27(1.75,4.225) 28(1.25,4.225) 29(0.75,4.225) 30(0.25,4.225) 31(-0.25,4.225) 32(-0.75,4.225) 33(-1.25,4.225) 34(-1.75,4.225) 35(-2.25,4.225) 36(-2.75,4.225)
  oval 0.25x0.8 smd: 1(-2.75,-3.4) 2(-2.25,-3.4) 3(-1.75,-3.4) 4(-1.25,-3.4) 5(-0.75,-3.4) 6(-0.25,-3.4) 7(0.25,-3.4) 8(0.75,-3.4) 9(1.25,-3.4) 10(1.75,-3.4) 11(2.25,-3.4) 12(2.75,-3.4) 25(2.75,3.4) 26(2.25,3.4) 27(1.75,3.4) 28(1.25,3.4) 29(0.75,3.4) 30(0.25,3.4) 31(-0.25,3.4) 32(-0.75,3.4) 33(-1.25,3.4) 34(-1.75,3.4) 35(-2.25,3.4) 36(-2.75,3.4)
  oval 0.8x0.25 smd: 13(3.4,-2.75) 14(3.4,-2.25) 15(3.4,-1.75) 16(3.4,-1.25) 17(3.4,-0.75) 18(3.4,-0.25) 19(3.4,0.25) 20(3.4,0.75) 21(3.4,1.25) 22(3.4,1.75) 23(3.4,2.25) 24(3.4,2.75) 37(-3.4,2.75) 38(-3.4,2.25) 39(-3.4,1.75) 40(-3.4,1.25) 41(-3.4,0.75) 42(-3.4,0.25) 43(-3.4,-0.25) 44(-3.4,-0.75) 45(-3.4,-1.25) 46(-3.4,-1.75) 47(-3.4,-2.25) 48(-3.4,-2.75)
  oval 1.45x0.3 smd paste-5: 13(4.225,-2.75) 14(4.225,-2.25) 15(4.225,-1.75) 16(4.225,-1.25) 17(4.225,-0.75) 18(4.225,-0.25) 19(4.225,0.25) 20(4.225,0.75) 21(4.225,1.25) 22(4.225,1.75) 23(4.225,2.25) 24(4.225,2.75) 37(-4.225,2.75) 38(-4.225,2.25) 39(-4.225,1.75) 40(-4.225,1.25) 41(-4.225,0.75) 42(-4.225,0.25) 43(-4.225,-0.25) 44(-4.225,-0.75) 45(-4.225,-1.25) 46(-4.225,-1.75) 47(-4.225,-2.25) 48(-4.225,-2.75)
  rect 5.6x5.6 smd: 47(0,0)
  silkscreen extent -3.65,-4.35 3.65,3.65, body extent -3.52,-3.52 3.52,3.52, height 0.5
TC2030-IDC-NL [mm] "Tag-Connect 6-Pin with No Legs (PN# TC2030-IDC-NL)"
  round 0.9 hole 0.995 unplated: 0(-2.54,0) 0(2.54,-1.016) 0(2.54,1.016)
  round 0.79 smd paste-0.39: 1(-1.27,-0.635) 2(-1.27,0.635) 3(0,-0.635) 4(0,0.635) 5(1.35,-0.635) 6(1.27,0.635)
  silkscreen extent -3.43,-1.91 3.43,1.9
TYPE-C-31-M-12 [mm]
  rect 0.6x1.45 smd: A1B12(-3.25,0) A4B9(-2.45,0) B1A12(3.25,0) B4A9(2.45,0)
  rect 0.3x1.45 smd: A5(-1.25,0) A6(-0.25,0) A7(0.25,0) A8(1.25,0) B5(1.75,0) B6(0.75,0) B7(-0.75,0) B8(-1.75,0)
  oval 1.1x2.4 / inner oval 1.3x2.4 / far side oval 1.3x2.4 hole 0.6 slot 1.7 at 90 deg: S1(-4.32,-0.915)
  oval 1.3x2 hole 0.6 slot 1.2 at 90 deg: S1(-4.32,-5.095) S1(4.32,-5.095)
  oval 1.1x2.4 / inner oval 1x2.1 / far side oval 1.3x2.4 hole 0.6 slot 1.7 at 90 deg: S1(4.32,-0.915)
  round 0 hole 0.65 unplated: ""(-2.89,-1.445) ""(2.89,-1.445)
  body extent -4.47,-7.72 4.47,0.18, height 3.21
UDB_combo_JST_MOLEX [mm]
  rect 0.6x1.2 smd: 1(-1.8,2.2) 2(-0.6,2.2) 3(0.6,2.2) 4(1.8,2.2)
  rect 0.6x1.55 smd: 1(-1.5,2.021) 2(-0.5,2.021) 3(0.5,2.021) 4(1.5,2.021)
  rect 0.85x1 smd: 5(-2.94,-1.887) 5(2.94,-1.887)
  rect 1.2x1.8 smd: 5(-2.8,-1.854) 5(2.8,-1.854)
  body extent -3.01,-2.62 2.99,2.33, height 2.96
"WS2812B - 2020" [mm]
  rect 1x0.7 smd: 1(1.065,0.55) 2(-1.065,0.55) 3(-1.065,-0.55) 4(1.065,-0.55)
  silkscreen extent -2.03,-0.89 0.38,1.39, body extent -1.1,-1 1.1,1, height 0.86
"XKB Switch" [mm] "XKB Enterprise TS-1187A-C-D-B"
  rect 1x0.75 smd: 1(-3,1.875) 1(3,1.875) 2(-3,-1.875) 2(3,-1.875)
  body extent -3.25,-2.55 3.25,2.55, height 2

## Part data
C301 C302 C303 C304 C305 C312 C401 C402 C403 C404 C405 C406 C407 C408 C409 C410 C411 C412: library part Cap, "Capacitor", LCSC MFG=YAGEO, LCSC Part #=C14663, MRF.Part=CC0603KRX7R9BB104, Version="0603 imperial"
  C401 C402 C403 C404 C405 C406 C407 C408 C409 C410 C411 C412: MFG=KEMET, MFGPN=C0603C104M5RACTU
C306 C309: library part Cap, "Capacitor", LCSC MFG="Samsung Electro-Mechanics", LCSC Part #=C19666, MRF.Part=CL10A475KO8NNNC, Version="0603 imperial"
C307 C308: library part Cap, "Capacitor", LCSC MFG="Samsung Electro-Mechanics", LCSC Part #=C15849, MRF.Part=CL10A105KB8NNNC, Version="0603 imperial"
C310: library part Cap, "Capacitor", LCSC MFG="Samsung Electro-Mechanics", LCSC Part #=C1623, MRF.Part=CL10B474KA8NNNC, Version="0603 imperial"
CON301: LCSC MFG="Korean Hroparts Elec", LCSC Part #=C165948, MRF.Part=TYPE-C-31-M-12
CON302: library part "Header 3X2", "Header, 3-Pin, Dual row"
CON303: "Header, 2-Pin"
CON304: "JST for USB daughter board", LCSC MFG="JST Sales America", LCSC Part #=C160404, MRF.Part=SM04B-SRSS-TB(LF)(SN)
D201 D202 D203 D204 D205 D206 D207 D208 D209 D210 D211 D212 D213 D214 D215 D216 D217 D218 D219 D220 D221 D222 D223 D224 D225 D226 D227 D228 D229 D230 D231 D232 D233 D234 D235 D236 D237 D238 D239 D240 D241 D242 D243 D244 D245 D246 D247 D248 D249 D250 D251 D252 D253 D254 D255 D256 D257 D258 D259 D260 D261 D262 D263 D264 D265 D266 D267 D268 D269 D270: "Default Diode", LCSC MFG=Semtech, LCSC Part #=C81598, MRF.Part=1N4148W
D301: LCSC MFG="ProTek Devices", LCSC Part #=C85364, MRF.Part=SRV05-4-P-T7
F301: "Thermal Fuse", LCSC MFG="Shenzhen JDT Fuse", LCSC Part #=C135338, MRF.Part=ASMD1206-050
L301: LCSC MFG=Sunlord, LCSC Part #=C1015, MRF.Part=GZ2012D101TF, Version="0806 imperial"
LED401 LED402 LED403 LED404 LED405 LED406 LED407 LED408 LED409 LED410 LED411 LED412: LCSC MFG=XINGLIGHT, LCSC Part #=C3646929, MRF.Part=XL-0807RGBC-WS2812B
Q301: "P-Channel Power MOSFET", LCSC MFG="Vishay Intertech", LCSC Part #=C10487, MRF.Part=SI2301CDS-T1-GE3, Version=SOT23-3
Q302: library part MOSFET-N, "N-Channel MOSFET", LCSC MFG="Changjiang Electronics Tech (CJ)", LCSC Part #=C8545, MRF.Part=2N7002
R301 R302: "Resistor", LCSC MFG="Uniroyal Elec", LCSC Part #=C23186, MRF.Part=0603WAF5101T5E, Version="0603 imperial"
R303 R304 R306 R307: "Resistor", LCSC MFG="Uniroyal Elec", LCSC Part #=C25804, MRF.Part=0603WAF1002T5E, Version="0603 imperial"
R305: "Resistor", LCSC MFG="Uniroyal Elec", LCSC Part #=C25803, MRF.Part=0603WAF1003T5E, Version="0603 imperial"
R308: "Resistor", LCSC MFG="UNI-ROYAL(Uniroyal Elec)", LCSC Part #=C23179, MRF.Part=0603WAF4700T5E, Version="0603 imperial"
R401: "Resistor", LCSC MFG="Uniroyal Elec", LCSC Part #=C23179, MFG="Panasonic Electronic Components", MFGPN=ERJ-3EKF5101V, MRF.Part=0603WAF4700T5E, Version="0603 imperial"
S201 S202 S203 S204 S205 S206 S207 S208 S209 S210 S211 S212 S213 S214 S216 S217 S218 S219 S220 S221 S222 S223 S224 S225 S226 S227 S228 S229 S230 S231 S232 S233 S234 S235 S236 S237 S238 S239 S240 S241 S242 S243 S244 S245 S246 S247 S248 S249 S250 S251 S252 S253 S254 S255 S256 S257 S258 S259 S260 S261 S262 S263 S264 S265 S266 S267 S268 S269 S270: library part SW-PB, "Switch"
S215: library part SW-PB, "TAB"
S301: "Switch", LCSC MFG="XKB Enterprise", LCSC Part #=C318888, MRF.Part=TS-1187A-C-D-B
U301: LCSC MFG=Geehy, LCSC Part #=C915660, MRF.Part=APM32F072CBT6
U304: library part "SOT23 LDO", LCSC MFG="Torex Semicon", LCSC Part #=C5446, MRF.Part=XC6206P332MR

## Free pads (board coordinates)
  round 1.152 hole 1.152 unplated paste+0.148 mask+0.148: ""(-282.194,91.313) ""(-281.94,3.048) ""(-3.429,91.821)
  round 0 hole 1.5 slot 200 at 0 deg unplated mask+0.15: ""(-142.5,37.79)

## Via types
v1: diameter 0.6, hole 0.3, Component Side to Bottom Layer, tented both sides, 156 vias
v2: diameter 1, hole 0.5, Component Side to Bottom Layer, tented both sides, 42 vias
v3: diameter 0.6, hole 0.3, Component Side to Bottom Layer, tented bottom, 25 vias

## Nets (pads, with @x,y where several pads share a name; then routed paths per layer and width w, separated by ;. In a path a pad name is that pad's centre, name@x,y a point inside that pad or via, vN(x,y) a via of type N, cw(c..) or ccw(c..) an arc to the next point about the centre after c; other vN are vias at no path point)
BOOT0: C309.1 CON303.1 R304.1 S301.2 U301.44 | length 51.5
  Component Side w0.254: v1(-51,65.84) ccw(c-50.8,65.683) -51.054,65.683 -51.054,65.443 ccw(c-50.8,65.444) -50.967,65.252 -50.862,65.162 cw(c-51.029,64.97) -50.849,65.15 -50.814,65.115 U301.44@-50.408,64.708 ; v1(-32.512,62.23) -25.908,62.23 cw(c-25.908,59.69) -23.368,59.69 -23.368,57.404 cw(c-24.356,57.404) -24.356,56.416 C309.1@-24.881,56.416 -24.878,56.118 -24.878,55.289 R304.1@-24.877,54.991 -24.877,54.483 cw(c-27.417,54.483) -27.417,51.943 CON303.1@-27.94,51.943 -27.94,50.636 ccw(c-26.308,50.636) S301.2@-27.462,49.482 S301.2@-27.462,43.482
  Bottom Layer w0.254: v1@-50.919,65.905 cw(c-49.674,64.66) -49.674,66.421 -41.311,66.421 cw(c-41.311,63.881) -39.662,65.812 cw(c-41.311,63.881) -39.515,65.677 -36.812,62.974 ccw(c-35.016,64.77) -35.471,62.271 ccw(c-35.016,64.77) -35.016,62.23 v1(-32.512,62.23)
col0: S201.2 S215.2 S229.2 S243.2 S257.2 U301.17 | length 163.2
  Component Side w0.254: U301.17@-44.433,58.733 -37.066,51.366 -36.813,51.114 cw(c-36.993,50.934) -36.811,51.112 cw(c-38.608,49.316) -36.385,50.545 cw(c-38.862,48.863) -35.868,48.863 -35.868,44.704 ccw(c-33.782,44.704) -34.513,42.75 ccw(c-33.782,44.704) -33.782,42.618 -25.436,42.618 ccw(c-25.436,44.704) -23.96,43.23 -21.386,45.804 cw(c-21.207,45.624) -21.328,45.847 cw(c-19.395,43.561) -19.395,46.555 -15.367,46.555 cw(c-15.367,44.752) -13.564,44.752 ccw(c-11.627,44.752) -11.627,42.815 S229.2@-11.412,42.815 -11.412,47.882 ccw(c-13.952,47.882) -12.156,49.678 S229.2@-13.794,51.315 -12.156,52.952 ccw(c-13.952,54.748) -11.412,54.748 S215.2@-11.412,70.365 -7.394,74.384 ccw(c-9.19,76.18) -6.65,76.18 S201.2@-6.65,89.415 ; S243.2@-23.556,32.765 S243.2@-22.531,32.765 ; S229.2@-14.031,52.133 S229.2@-13.144,52.133 ; S257.2@-9.031,13.215 -9.031,8.148 ccw(c-6.491,8.148) -8.287,6.352 S257.2@-6.65,4.715
  Bottom Layer w0.254: S243.2@-23.556,32.765 -22.531,32.765 S243.2@-14.031,24.265 -14.031,18.766 ccw(c-11.491,18.766) -13.287,16.97 -12.156,15.839 cw(c-13.952,14.043) -11.62,15.049 cw(c-13.952,14.043) -11.412,14.043 S257.2@-11.412,13.215 ; S243.2@-21.175,32.765 -21.175,33.052 S229.2@-11.412,42.815 ; S257.2@-18.794,5.215 -18.794,5.334 cw(c-16.254,5.334) -16.254,7.874 -9.19,7.874 cw(c-9.19,5.334) -6.65,5.334 S257.2@-6.65,4.715 ; S229.2@-14.031,51.815 S229.2@-13.794,51.815
col1: S202.2 S216.2 S230.2 S244.2 S258.2 U301.15 | length 151.8
  Component Side w0.254: U301.15@-45.14,58.026 -45.124,58.01 -44.623,57.51 cw(c-46.126,56.007) -44.001,56.007 cw(c-46.615,56.007) -44.628,54.309 cw(c-46.615,56.007) -44.768,54.158 -44.866,54.06 ccw(c-44.685,53.882) -44.894,54.026 ccw(c-44.453,53.724) -44.987,53.724 S230.2@-44.987,51.815 ; v1(-40.259,75.565) -40.242,75.548 -40.242,70.882 S216.2@-40.225,70.865 ; S258.2@-37.973,4.445 -37.203,5.215 S258.2@-30.699,5.215
  Bottom Layer w0.254: v1(-40.259,75.565) cw(c-40.259,76.581) -41.275,76.581 -41.275,83.82 cw(c-38.735,83.82) -38.735,86.36 -28.24,86.36 ccw(c-28.24,88.9) -25.7,88.9 S202.2@-25.7,89.415 ; S216.2@-40.225,70.865 -40.225,69.676 ccw(c-39.201,69.676) -40.144,69.278 ccw(c-39.201,69.676) -39.6,68.734 ccw(c-39.201,69.676) -39.201,68.653 -38.989,68.653 cw(c-38.989,65.205) -38.554,68.625 cw(c-38.989,65.205) -37.87,68.466 cw(c-38.989,65.205) -36.592,67.683 ccw(c-36.416,67.867) -36.583,67.675 cw(c-38.535,65.405) -35.688,66.332 cw(c-38.535,65.405) -35.589,65.942 ccw(c-35.34,65.988) -35.559,65.86 ccw(c-34.761,66.332) -34.761,65.405 -33.401,65.405 cw(c-33.401,63.373) -31.369,63.373 -31.369,55.435 cw(c-33.909,55.435) -33.909,52.895 -39.758,52.895 ccw(c-39.987,51.315) -41.446,51.965 cw(c-41.678,52.069) -41.677,51.815 S230.2@-44.987,51.815 -44.987,46.355 ccw(c-42.447,46.355) -42.447,43.815 -30.621,43.815 cw(c-30.621,41.275) -28.081,41.275 S244.2@-28.081,32.265 -28.081,26.805 cw(c-30.621,26.805) -28.204,26.023 cw(c-30.621,26.805) -29.839,24.388 S244.2@-30.048,24.179 ; S258.2@-30.699,5.215 -32.099,6.615 cw(c-30.303,8.411) -32.843,8.411 S258.2@-32.843,13.215 -30.734,13.215 ccw(c-30.734,15.755) -29.976,13.331 ccw(c-30.734,15.755) -28.31,14.997 ccw(c-30.734,15.755) -28.194,15.755 -28.194,21.759 ccw(c-30.7,21.759) -29.198,23.765 ccw(c-30.7,21.759) S244.2@-30.048,24.179 ; S244.2@-30.7,24.265 cw(c-30.7,21.759) S244.2@-30.048,24.179
col2: S203.2 S217.2 S231.2 S245.2 S259.2 U301.14 | length 153.6
  Component Side w0.254: S231.2@-59.037,52.051 S231.2@-59.037,51.315 -49.305,51.315 ccw(c-49.305,53.855) -47.509,52.059 -45.088,54.48 ccw(c-46.615,56.007) -44.455,56.007 ccw(c-45.969,56.007) -44.898,57.077 U301.14@-45.493,57.673 ; U301.14@-45.52,57.731 cw(c-45.693,57.546) -45.515,57.726 U301.14@-45.477,57.689
  Bottom Layer w0.254: S259.2@-49.75,13.715 -55.644,19.609 cw(c-53.848,21.405) -56.388,21.405 -56.388,30.889 cw(c-54.512,30.889) S245.2@-54.512,32.765 -54.512,31.75 ccw(c-51.972,31.75) -51.972,29.21 -47.29,29.21 ccw(c-47.29,31.75) -44.75,31.75 S245.2@-44.75,32.265 -44.75,32.712 cw(c-43.01,32.712) -43.183,34.443 cw(c-43.159,34.19) -43.166,34.444 ccw(c-43.25,37.79) -43.01,34.452 ccw(c-43.25,37.79) -41.325,35.052 ccw(c-41.364,35.303) -41.186,35.122 -40.944,35.364 cw(c-40.766,35.183) -40.942,35.366 ccw(c-43.25,37.79) -42.849,41.113 cw(c-42.816,41.365) -42.863,41.115 ccw(c-43.088,39.975) -43.086,41.137 -54.722,41.137 cw(c-54.721,41.391) -54.744,41.138 ccw(c-54.943,39.164) -54.943,41.148 -56.497,41.148 cw(c-56.497,43.688) -59.037,43.688 S231.2@-59.037,51.315 -59.037,55.499 ccw(c-61.577,55.499) -61.577,58.039 -61.722,58.039 cw(c-61.722,59.69) -63.373,59.69 -63.373,65.278 cw(c-60.833,65.278) -60.833,67.818 -56.815,67.818 ccw(c-56.815,70.358) -54.275,70.358 S217.2@-54.275,70.365 cw(c-54.275,72.732) -56.642,72.732 -56.642,83.312 cw(c-54.102,83.312) -54.102,85.852 -47.29,85.852 ccw(c-47.29,88.392) -44.75,88.392 S203.2@-44.75,89.415
col3: S204.2 S218.2 S232.2 S246.2 S260.2 U301.13 | length 212.3
  Component Side w0.254: S232.2@-78.087,51.315 -78.087,52.505 cw(c-75.547,52.505) -75.547,55.045 -58.002,55.045 cw(c-58.002,52.505) -56.206,54.301 -54.418,52.513 ccw(c-52.622,54.309) -52.622,51.769 -49.305,51.769 ccw(c-49.305,53.855) -47.829,52.381 -46.041,54.169 -45.41,54.8 ccw(c-46.615,56.007) -44.909,56.007 ccw(c-45.969,56.007) -45.013,56.465 ccw(c-45.242,56.355) -45.063,56.535 -45.44,56.912 U301.13@-45.847,57.319 ; S260.2@-63.799,4.715 -59.775,4.715 S260.2@-59.274,5.215
  Bottom Layer w0.254: S246.2@-73.562,32.765 -73.562,31.623 ccw(c-71.022,31.623) -71.022,29.083 -66.34,29.083 ccw(c-66.34,31.623) -63.8,31.623 S246.2@-63.8,32.265 ; S260.2@-63.799,4.715 -59.781,8.734 ccw(c-61.577,10.53) -59.037,10.53 S260.2@-59.037,13.215 -59.037,29.725 ccw(c-61.577,29.725) -61.577,32.265 S246.2@-63.8,32.265 ; S204.2@-63.8,89.415 -72.581,80.634 ccw(c-70.785,78.838) -73.325,78.838 S218.2@-73.325,70.365 -73.325,57.13 cw(c-75.865,57.13) -74.069,55.334 S232.2@-78.087,51.315 -78.087,43.223 ccw(c-75.547,43.223) -75.547,40.683 -43.088,40.683 cw(c-43.088,39.975) -42.94,40.667 ccw(c-42.888,40.916) -42.919,40.664 cw(c-43.25,37.79) -43.25,34.897 -61.26,34.897 ccw(c-61.26,32.357) -63.8,32.357 S246.2@-63.8,32.265
col4: S205.2 S219.2 S233.2 S247.2 S261.2 U301.11 | length 274.1
  Component Side w0.254: S233.2@-97.137,51.315 -97.137,52.959 cw(c-94.597,52.959) -94.597,55.499 -58.002,55.499 cw(c-58.002,52.505) -55.884,54.621 ; -56.18,54.881 cw(c-58.002,52.505) -55.884,54.621 ; U301.11@-48.287,57.673 -48.693,57.266 -48.696,57.252 -48.703,57.222 cw(c-48.905,57.376) -48.707,57.216 ccw(c-48.34,56.912) -48.766,57.126 cw(c-48.992,57.242) -48.773,57.113 ccw(c-47.337,56.259) -49.008,56.274 ccw(c-47.337,56.259) -49.008,56.259 ccw(c-46.777,56.007) -49.022,56.007 -49.022,54.763 cw(c-51.562,54.763) -51.562,52.223 -52.622,52.223 cw(c-52.622,54.309) -54.1,52.837 -55.884,54.621
  Bottom Layer w0.254: S261.2@-104.281,13.215 -104.281,10.53 ccw(c-101.741,10.53) -103.537,8.734 S261.2@-99.518,4.715 -99.018,5.215 S261.2@-94.993,5.215 -94.756,5.453 S261.2@-94.756,13.215 -94.756,29.569 cw(c-92.216,29.569) -94.012,31.365 S247.2@-92.612,32.765 -92.612,31.75 ccw(c-90.072,31.75) -90.072,29.21 -85.39,29.21 ccw(c-85.39,31.75) -82.85,31.75 S247.2@-82.85,32.265 -82.85,32.811 cw(c-80.31,32.811) -80.31,35.351 -43.25,35.351 ccw(c-43.25,37.79) -42.971,40.213 ; S205.2@-82.85,89.415 -91.631,80.634 ccw(c-89.835,78.838) -92.375,78.838 S219.2@-92.375,70.365 -92.375,57.13 cw(c-94.915,57.13) -93.119,55.334 S233.2@-97.137,51.315 -97.137,42.769 ccw(c-94.597,42.769) -94.597,40.229 -43.088,40.229 cw(c-43.088,39.975) -43.033,40.223 ccw(c-42.888,40.916) -42.972,40.213 ccw(c-42.888,40.916) -42.971,40.213 ; -41.226,39.151 ccw(c-43.25,37.79) -42.971,40.213